# Altium PCB PCB_RAM1.PcbDoc
Units mil, origin at the board's own origin, x right, y up, seen from the top; angles counter-clockwise.
Board outline 3440 x 3440 mil, 4 copper layers (Top Signal, PWR, GND, Bottom Signal), stack 23.756 mil thick; 46 components, 96 nets, 440 pads, 4 vias.
Unrouted connection lines stored in the file: 277.
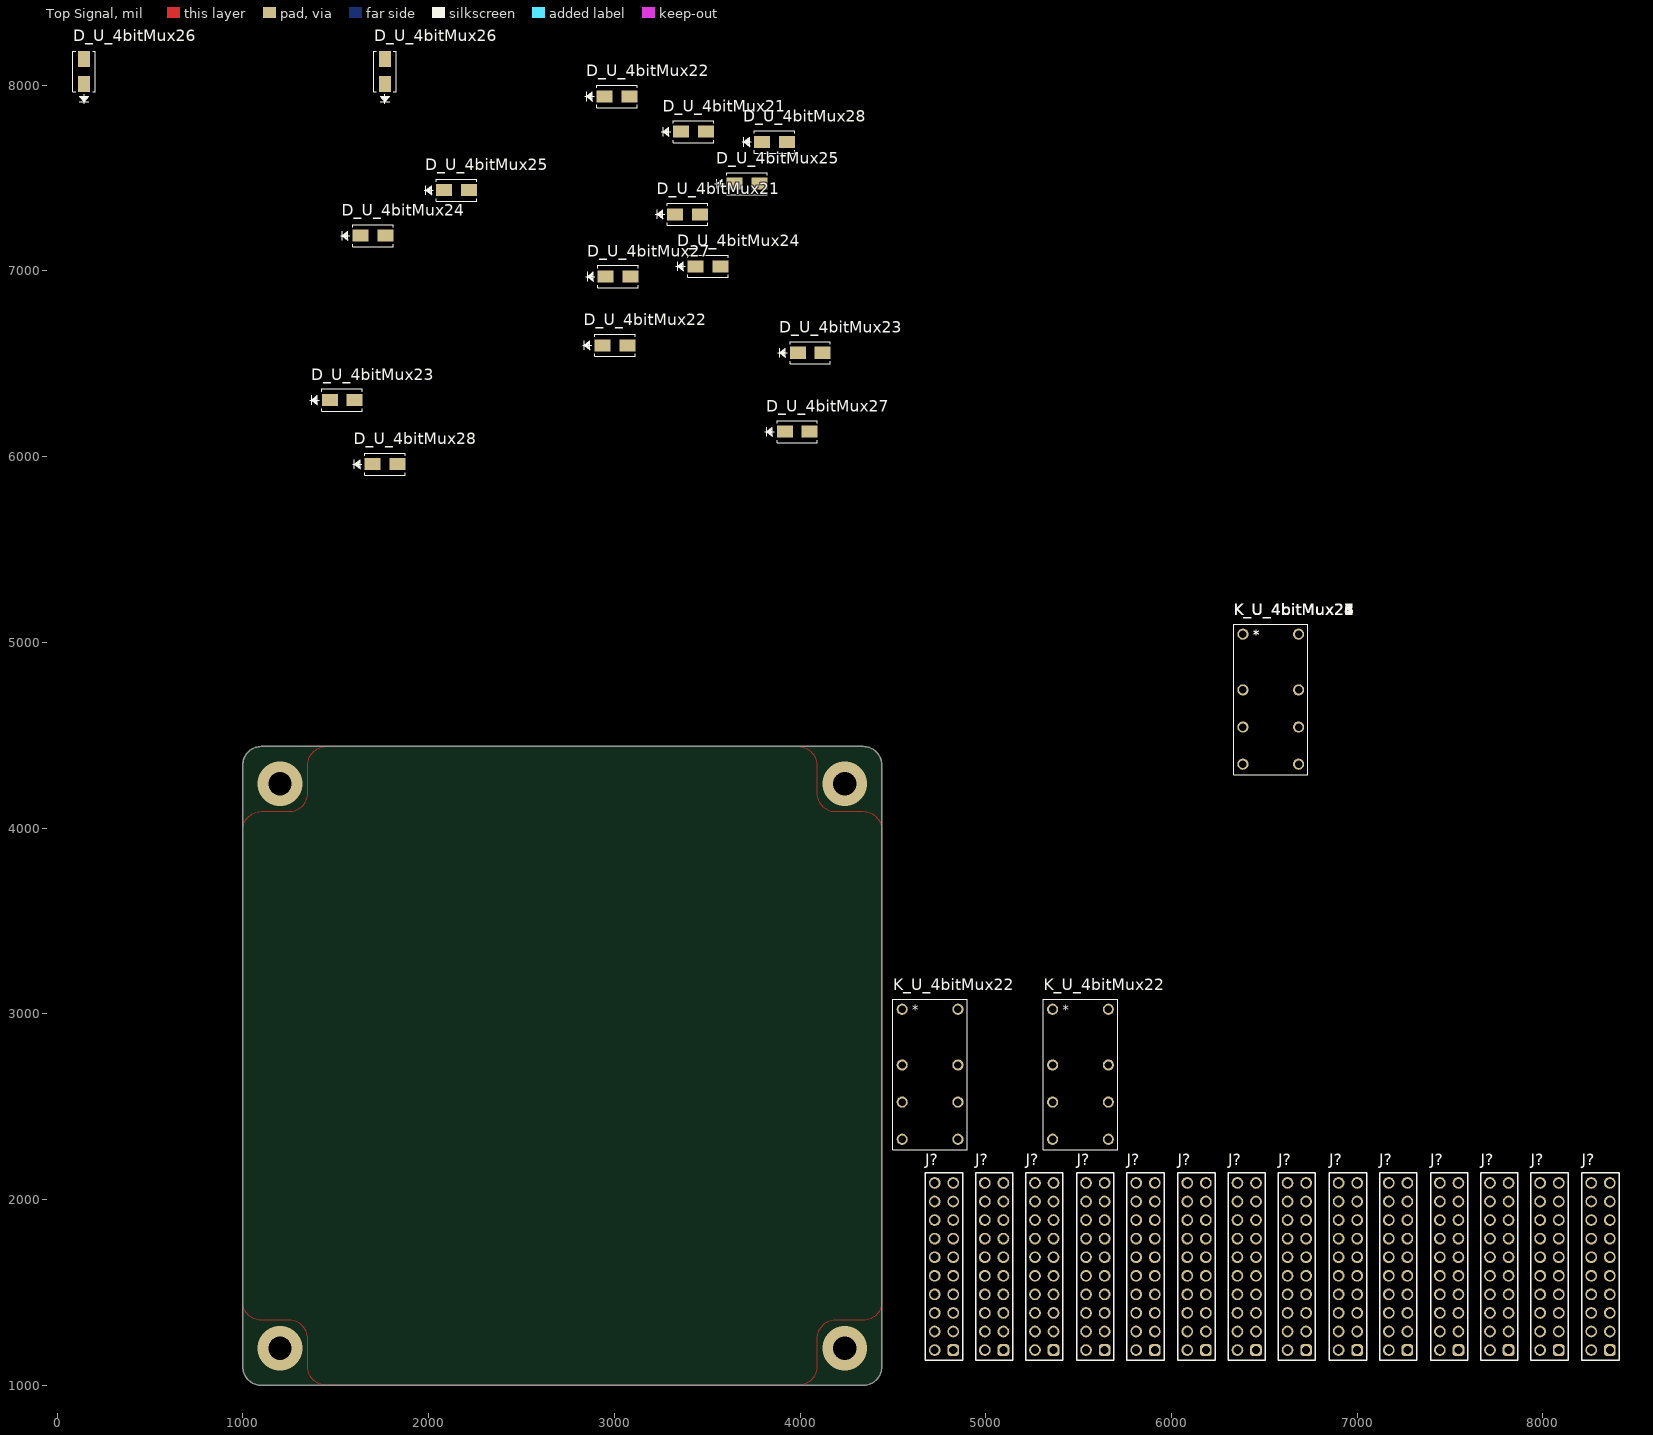
[diagram p0: Top Signal view]
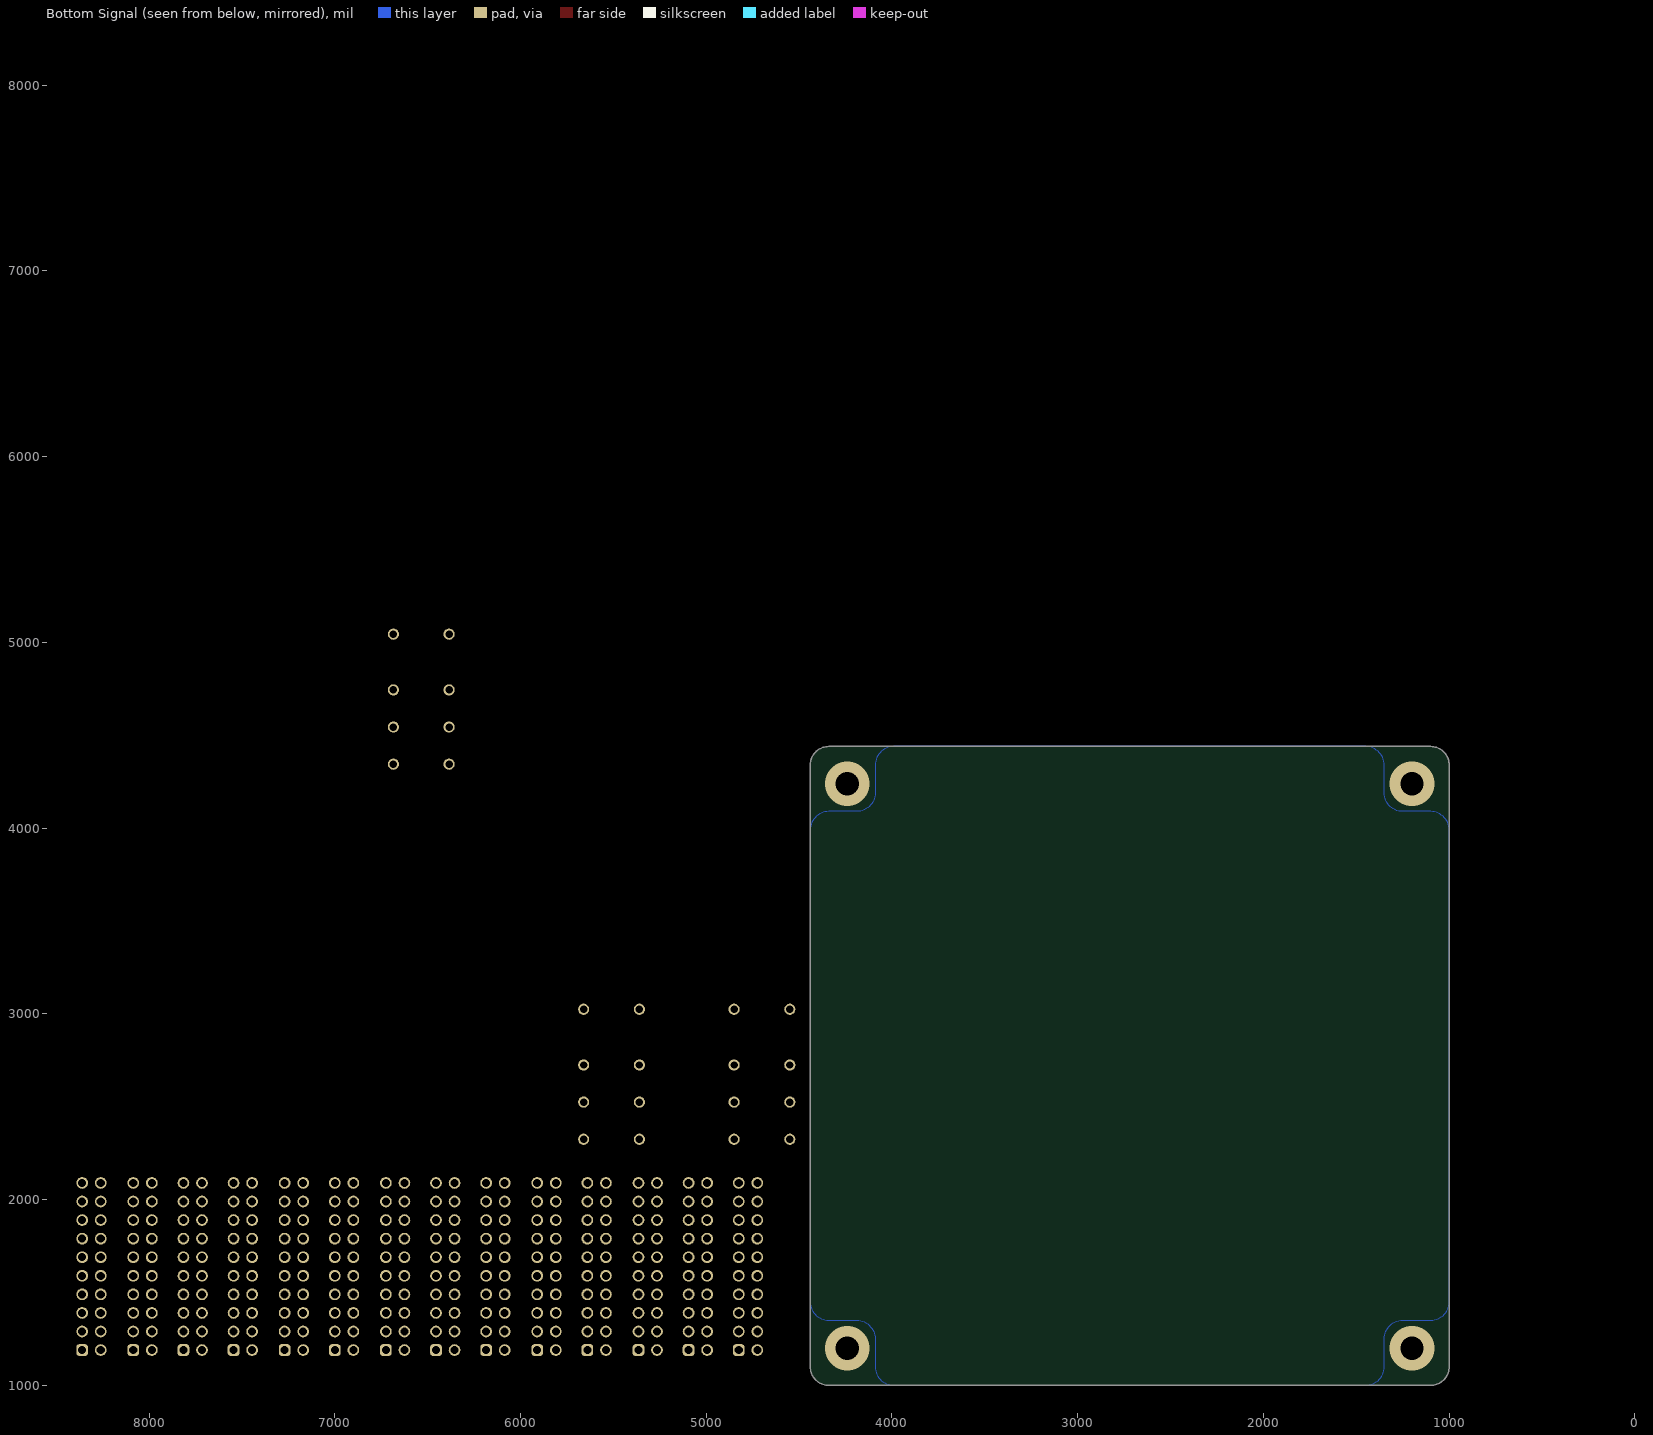
[diagram p1: Bottom Signal view, seen from below]
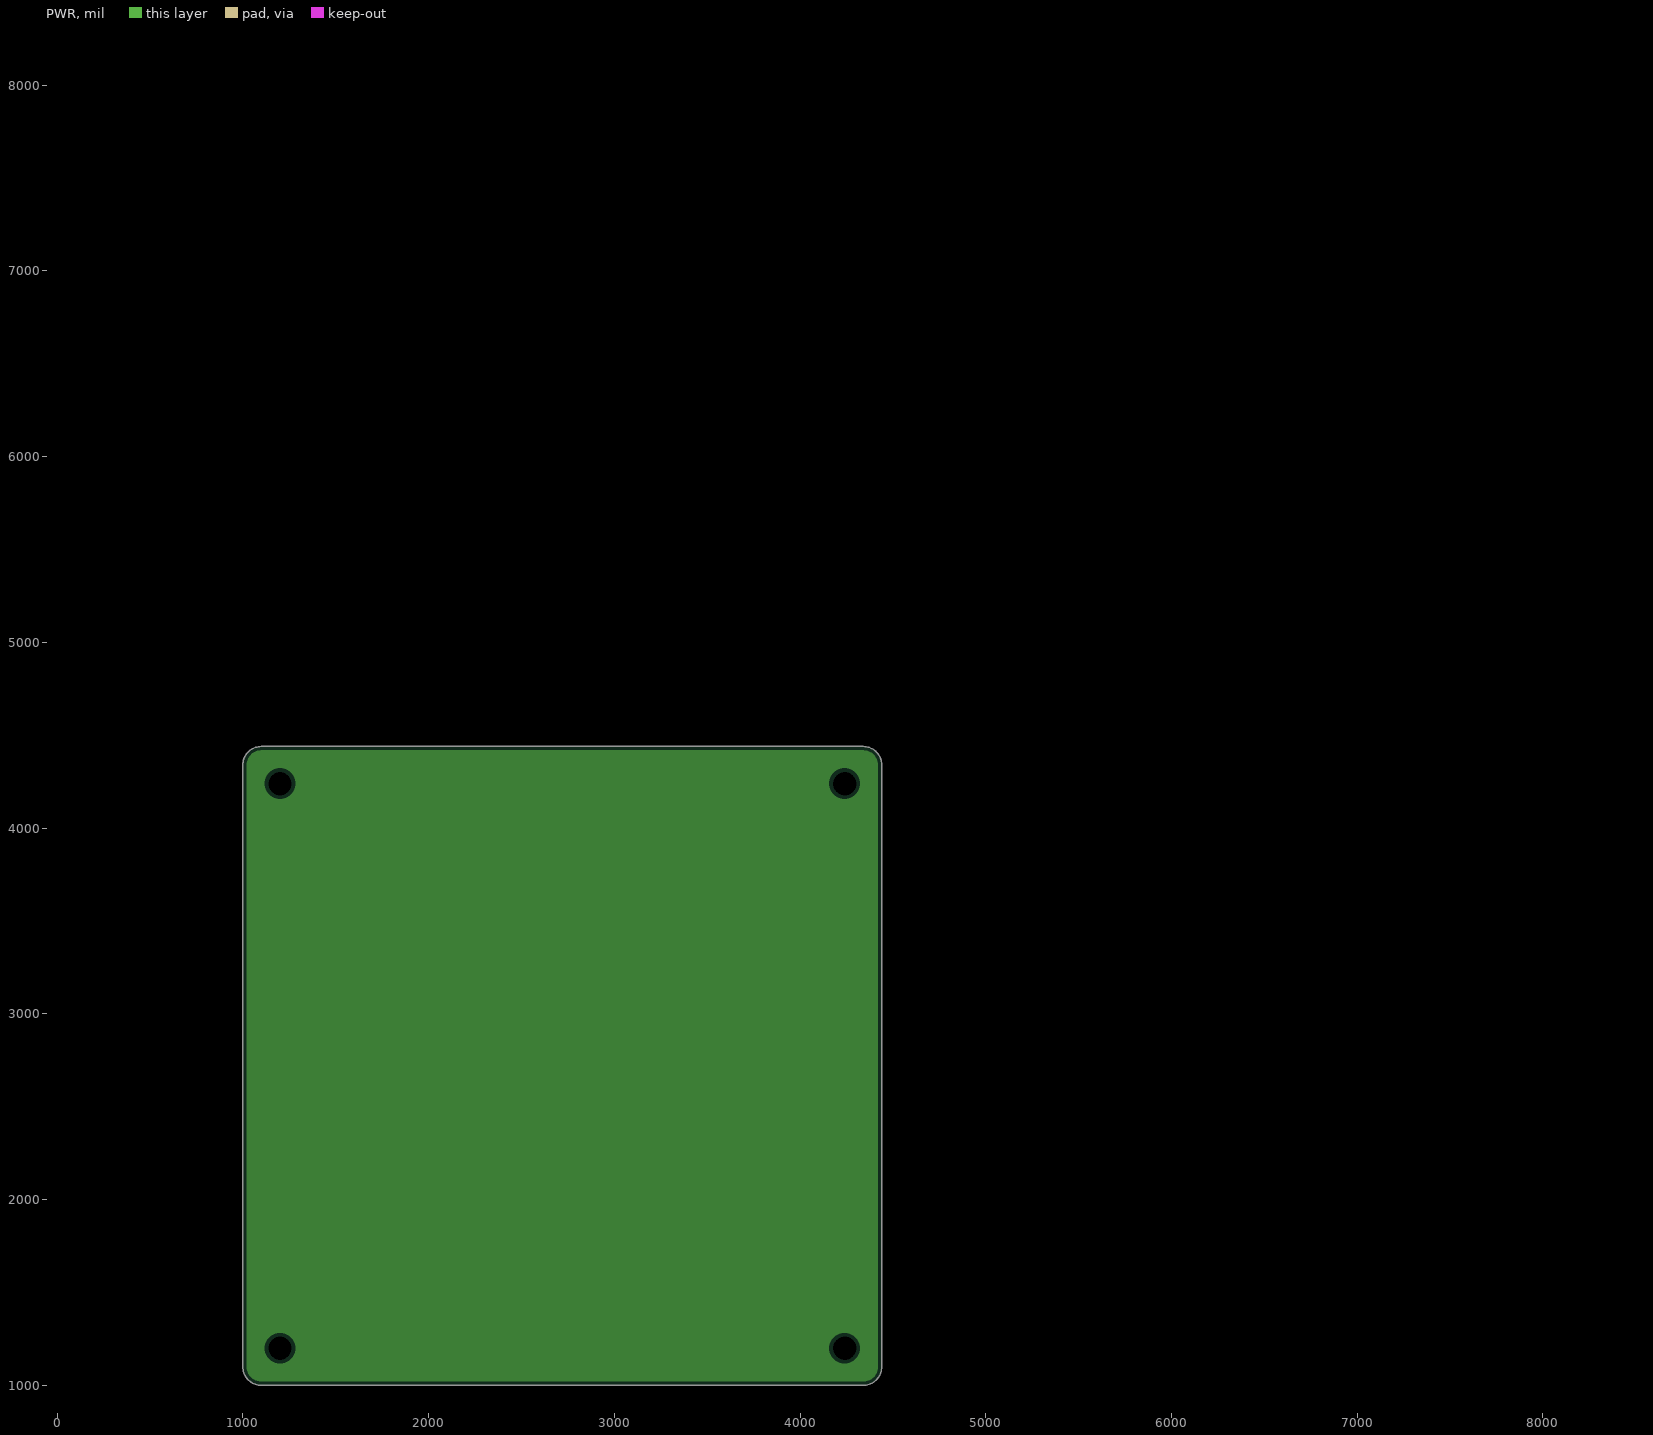
[diagram p2: PWR, clearances drawn from the general rule]
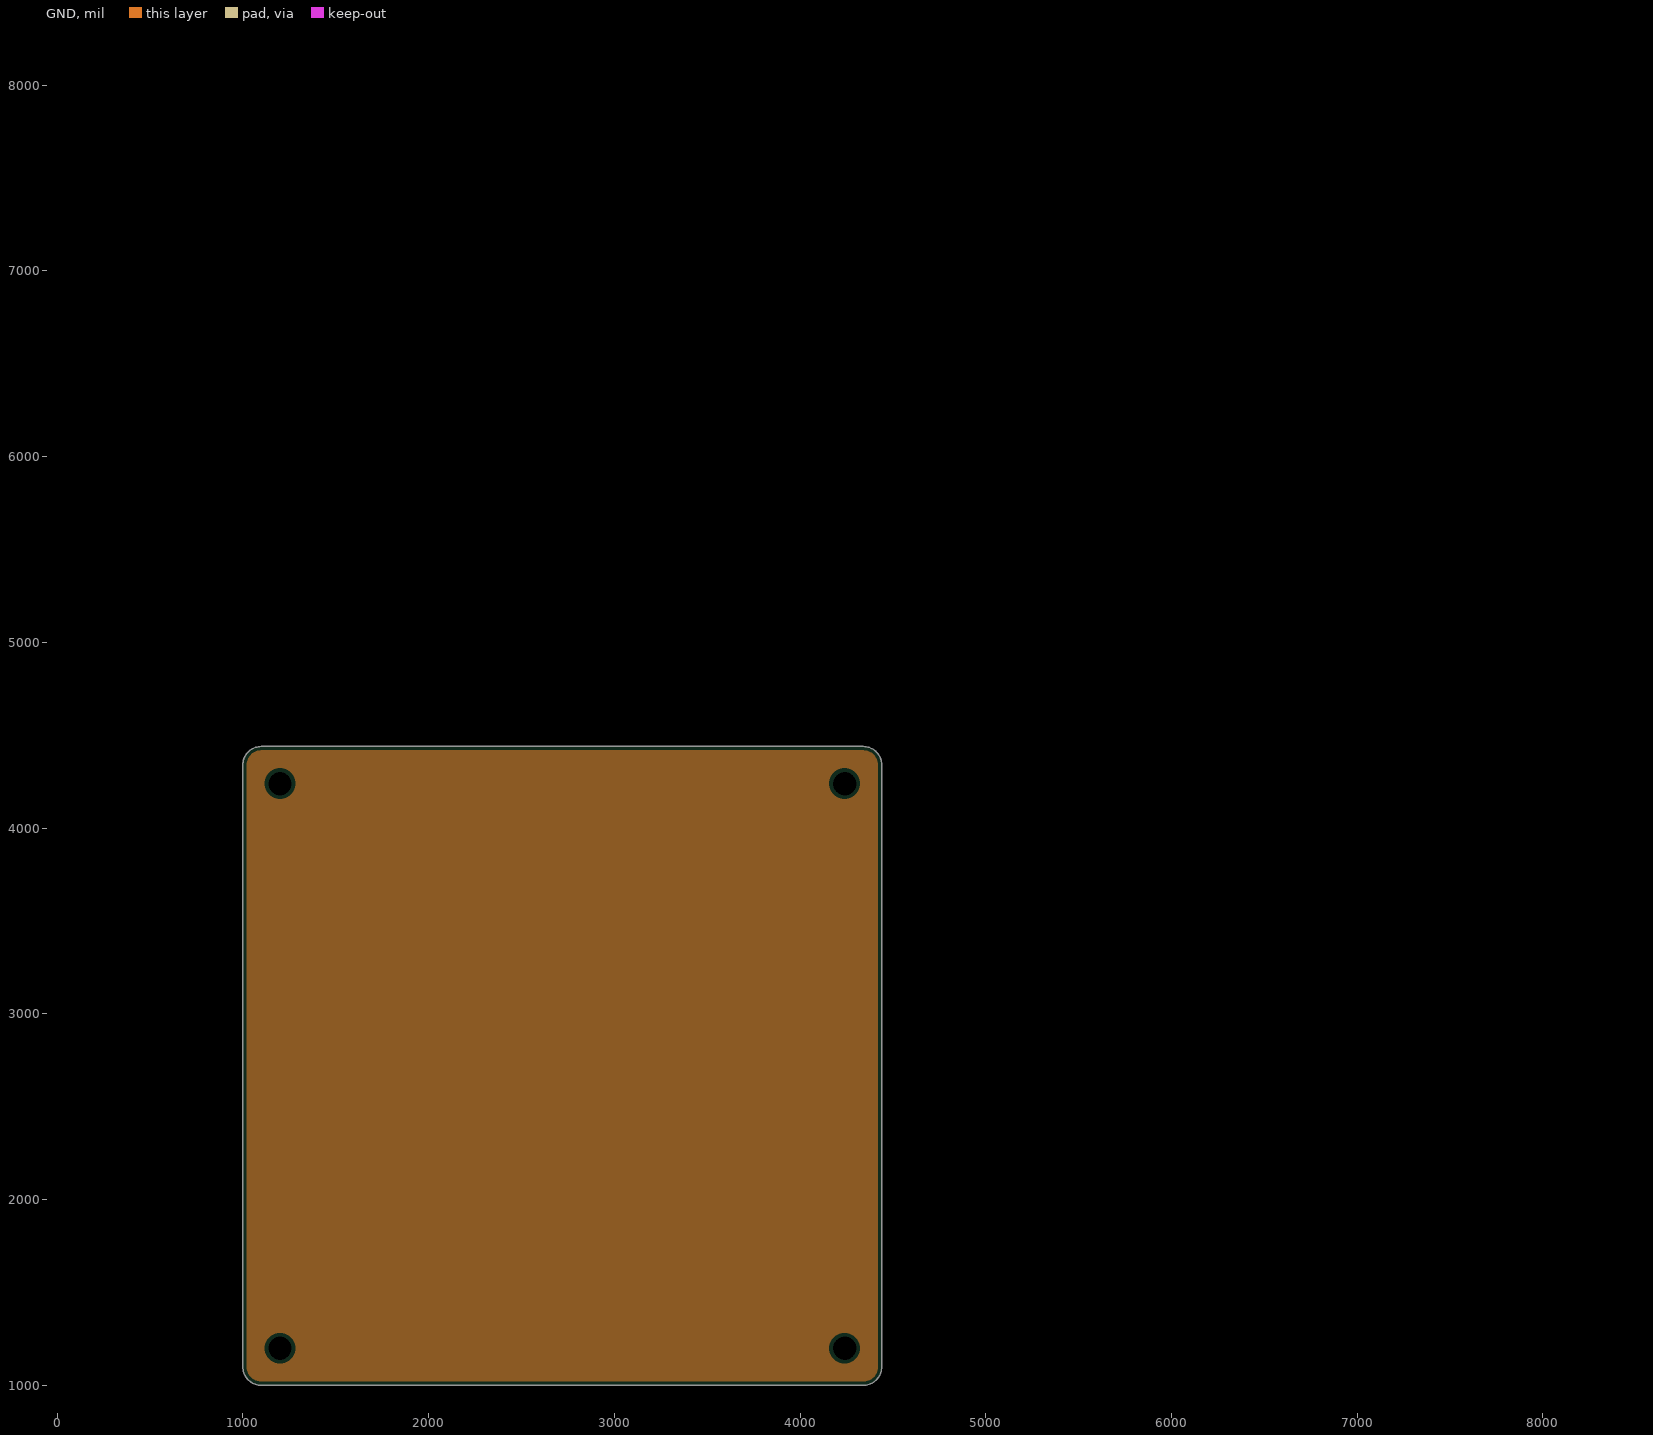
[diagram p3: GND, clearances drawn from the general rule]

## Layer stack, top to bottom
Top Solder: solder mask 0.4, Solder Resist, Dk 3.5
Top Signal: signal copper 1.4
Dielectric 2: prepreg 2.8, PP-006, Dk 4.1
PWR: plane copper 1.378, net +24V
Dielectric 1: dielectric 12.6, FR-4, Dk 4.8
GND: plane copper 1.378, net GND
Dielectric 3: prepreg 2.8, PP-006, Dk 4.1
Bottom Signal: signal copper 1.4
Bottom Solder: solder mask 0.4, Solder Resist, Dk 3.5

## Board outline
1000,4340 cw(c1100,4340) 1100,4440 4340,4440 cw(c4340,4340) 4440,4340 4440,1100 cw(c4340,1100) 4340,1000 1100,1000 cw(c1100,1100) 1000,1100 1000,2825

## Design rules (kind name [scope] priority, off if disabled: settings)
Clearance [All] p1: gap=10 ignorepadtopadclearanceinfootprint=FALSE
PlaneClearance [All] p1: clearance=20
PlaneConnect [All] p1: planeconnectstyle=Relief reliefexpansion=20 reliefentries=4 reliefconductorwidth=10 reliefairgap=10
PolygonConnect [All] p1: connectstyle=Relief reliefconductorwidth=10 reliefentries=4 polygonreliefangle="90 Angle" airgapwidth=10
RoutingVias [All] p1: holewidth=28 width=50 viastyle="Through Hole" minholewidth=28 minwidth=50 maxholewidth=28 maxwidth=50
SolderMaskExpansion [All] p1: expansion=4 istentingtop=FALSE
SupplyNets "Schematic Supply Nets_1" [InNet('GND')] p1: voltage=0.000
SupplyNets "Schematic Supply Nets" [InNet('+24V')] p2: voltage=0.000
Width [All] p1: maxlimit=10 minlimit=10 preferedwidth=10
28 further rules are at their usual default settings.

## Classes and differential pairs
component class RAM1_top: J?
channel class 4bitMux2: U_4bitMux21 U_4bitMux22 U_4bitMux23 U_4bitMux24 U_4bitMux25 U_4bitMux26 U_4bitMux27 U_4bitMux28
component class U_4bitMux28: D_U_4bitMux27 K_U_4bitMux28
component class U_4bitMux27: D_U_4bitMux21 K_U_4bitMux27
component class U_4bitMux26: D_U_4bitMux21 K_U_4bitMux26
component class U_4bitMux25: D_U_4bitMux22 K_U_4bitMux25
component class U_4bitMux24: D_U_4bitMux21 K_U_4bitMux24
component class U_4bitMux23: D_U_4bitMux21 K_U_4bitMux23
component class U_4bitMux22: D_U_4bitMux22 K_U_4bitMux22
component class U_4bitMux21: D_U_4bitMux24 K_U_4bitMux21

## Components (designator, comment, footprint, x,y, rotation, side; value= is the part's Value field where it differs from the comment)
D_U_4bitMux21 "SMAJ24A" "DI SMAJ24A" 3427,7750 r0 top value=650pF (schematic designator D)
D_U_4bitMux21 "SMAJ24A" "DI SMAJ24A" 3395,7305 r0 top value=650pF (schematic designator D)
D_U_4bitMux22 "SMAJ24A" "DI SMAJ24A" 3003,6600 r0 top value=650pF (schematic designator D)
D_U_4bitMux22 "SMAJ24A" "DI SMAJ24A" 3015,7940 r0 top value=650pF (schematic designator D)
D_U_4bitMux23 "SMAJ24A" "DI SMAJ24A" 4055,6560 r0 top value=650pF (schematic designator D)
D_U_4bitMux23 "SMAJ24A" "DI SMAJ24A" 1535,6305 r0 top value=650pF (schematic designator D)
D_U_4bitMux24 "SMAJ24A" "DI SMAJ24A" 1700,7190 r0 top value=650pF (schematic designator D)
D_U_4bitMux24 "SMAJ24A" "DI SMAJ24A" 3505,7025 r0 top value=650pF (schematic designator D)
D_U_4bitMux25 "SMAJ24A" "DI SMAJ24A" 3715,7470 r0 top value=650pF (schematic designator D)
D_U_4bitMux25 "SMAJ24A" "DI SMAJ24A" 2150,7435 r0 top value=650pF (schematic designator D)
D_U_4bitMux26 "SMAJ24A" "DI SMAJ24A" 145,8075 r90 top value=650pF (schematic designator D)
D_U_4bitMux26 "SMAJ24A" "DI SMAJ24A" 1765,8075 r90 top value=650pF (schematic designator D)
D_U_4bitMux27 "SMAJ24A" "DI SMAJ24A" 3020,6970 r0 top value=650pF (schematic designator D)
D_U_4bitMux27 "SMAJ24A" "DI SMAJ24A" 3985,6135 r0 top value=650pF (schematic designator D)
D_U_4bitMux28 "SMAJ24A" "DI SMAJ24A" 3862,7695 r0 top value=650pF (schematic designator D)
D_U_4bitMux28 "SMAJ24A" "DI SMAJ24A" 1765,5960 r0 top value=650pF (schematic designator D)
J? "Con 2.54mm 10x2pos" "Con 2.54mm 10x2pos" 6405,1640 r90 top
J? "Con 2.54mm 10x2pos" "Con 2.54mm 10x2pos" 7495,1640 r90 top
J? "Con 2.54mm 10x2pos" "Con 2.54mm 10x2pos" 6675,1640 r90 top
J? "Con 2.54mm 10x2pos" "Con 2.54mm 10x2pos" 5590,1640 r90 top
J? "Con 2.54mm 10x2pos" "Con 2.54mm 10x2pos" 5860,1640 r90 top
J? "Con 2.54mm 10x2pos" "Con 2.54mm 10x2pos" 7220,1640 r90 top
J? "Con 2.54mm 10x2pos" "Con 2.54mm 10x2pos" 5045,1640 r90 top
J? "Con 2.54mm 10x2pos" "Con 2.54mm 10x2pos" 7765,1640 r90 top
J? "Con 2.54mm 10x2pos" "Con 2.54mm 10x2pos" 6135,1640 r90 top
J? "Con 2.54mm 10x2pos" "Con 2.54mm 10x2pos" 4775,1640 r90 top
J? "Con 2.54mm 10x2pos" "Con 2.54mm 10x2pos" 5315,1640 r90 top
J? "Con 2.54mm 10x2pos" "Con 2.54mm 10x2pos" 8310,1640 r90 top
J? "Con 2.54mm 10x2pos" "Con 2.54mm 10x2pos" 8035,1640 r90 top
J? "Con 2.54mm 10x2pos" "Con 2.54mm 10x2pos" 6950,1640 r90 top
K_U_4bitMux21 "J104D2C24VDC.15S" "Relay J104D2C24VDC.15S" 6384.5,5044.5 r0 top (schematic designator K)
K_U_4bitMux21 "J104D2C24VDC.15S" "Relay J104D2C24VDC.15S" 6384.5,5044.5 r0 top (schematic designator K)
K_U_4bitMux22 "J104D2C24VDC.15S" "Relay J104D2C24VDC.15S" 5360,3025 r0 top (schematic designator K)
K_U_4bitMux22 "J104D2C24VDC.15S" "Relay J104D2C24VDC.15S" 4550,3025 r0 top (schematic designator K)
K_U_4bitMux23 "J104D2C24VDC.15S" "Relay J104D2C24VDC.15S" 6384.5,5044.5 r0 top (schematic designator K)
K_U_4bitMux23 "J104D2C24VDC.15S" "Relay J104D2C24VDC.15S" 6384.5,5044.5 r0 top (schematic designator K)
K_U_4bitMux24 "J104D2C24VDC.15S" "Relay J104D2C24VDC.15S" 6384.5,5044.5 r0 top (schematic designator K)
K_U_4bitMux24 "J104D2C24VDC.15S" "Relay J104D2C24VDC.15S" 6384.5,5044.5 r0 top (schematic designator K)
K_U_4bitMux25 "J104D2C24VDC.15S" "Relay J104D2C24VDC.15S" 6384.5,5044.5 r0 top (schematic designator K)
K_U_4bitMux25 "J104D2C24VDC.15S" "Relay J104D2C24VDC.15S" 6384.5,5044.5 r0 top (schematic designator K)
K_U_4bitMux26 "J104D2C24VDC.15S" "Relay J104D2C24VDC.15S" 6384.5,5044.5 r0 top (schematic designator K)
K_U_4bitMux26 "J104D2C24VDC.15S" "Relay J104D2C24VDC.15S" 6384.5,5044.5 r0 top (schematic designator K)
K_U_4bitMux27 "J104D2C24VDC.15S" "Relay J104D2C24VDC.15S" 6384.5,5044.5 r0 top (schematic designator K)
K_U_4bitMux27 "J104D2C24VDC.15S" "Relay J104D2C24VDC.15S" 6384.5,5044.5 r0 top (schematic designator K)
K_U_4bitMux28 "J104D2C24VDC.15S" "Relay J104D2C24VDC.15S" 6384.5,5044.5 r0 top (schematic designator K)
K_U_4bitMux28 "J104D2C24VDC.15S" "Relay J104D2C24VDC.15S" 6384.5,5044.5 r0 top (schematic designator K)

## Footprints (in the part's own frame and the unit in brackets; to place one, negate y for a bottom-side part, rotate by r counter-clockwise, add the part's x,y. Pads: shape width x height; smd on the part's side, far side on the other; paste and mask are expansions set on the pad)
"Con 2.54mm 10x2pos" [mm]
  rrect50% 1.6x1.6 hole 1.1: 1(-11.43,-1.27)
  round 1.6 hole 1.1: 2(-11.43,1.27) 3(-8.89,-1.27) 4(-8.89,1.27) 5(-6.35,-1.27) 6(-6.35,1.27) 7(-3.81,-1.27) 8(-3.81,1.27) 9(-1.27,-1.27) 10(-1.27,1.27) 11(1.27,-1.27) 12(1.27,1.27) 13(3.81,-1.27) 14(3.81,1.27) 15(6.35,-1.27) 16(6.35,1.27) 17(8.89,-1.27) 18(8.89,1.27) 19(11.43,-1.27) 20(11.43,1.27)
  silkscreen extent -12.83,-2.54 12.83,2.54
"DI SMAJ24A" [mil]
  rect 86x65 smd paste+0 mask+4: 1(-67,0) 2(67,0)
  silkscreen extent -174,-60 109,60, body extent -104,-55 104,55, height 92
"Relay J104D2C24VDC.15S" [mil]
  round 60 hole 40 paste-99999 mask+0: 1(0,0) 2(0,-300) 3(0,-500) 4(0,-700) 5(300,-700) 6(300,-500) 7(300,-300) 8(300,0)
  silkscreen extent -50,-756 350,54, body extent -45,-751 345,49, height 450

## Part data
D_U_4bitMux21 D_U_4bitMux21 D_U_4bitMux22 D_U_4bitMux22 D_U_4bitMux23 D_U_4bitMux23 D_U_4bitMux24 D_U_4bitMux24 D_U_4bitMux25 D_U_4bitMux25 D_U_4bitMux26 D_U_4bitMux26 D_U_4bitMux27 D_U_4bitMux27 D_U_4bitMux28 D_U_4bitMux28: library part "DI SMAJ24A", "SMAJ Series 400 W 24 V Uni-Directional Surface Mount TVS Diode - DO-214AC", Breakdown Voltage=28.1V, Case/Package=SMA, Clamping Voltage=38.9V, Forward Voltage=3.5V, Leakage Current=1µA, Manufacturer=Littelfuse, Max Breakdown Voltage=29.5V, Max Junction Temperature (Tj)=150°C, Max Output current=10.3A, Max Power Dissipation=3.3W, Min Breakdown Voltage=26.7V, Min Operating Temperature=-65°C, Operating Supply Voltage=24V, Peak Pulse Power=400W, Power Line Protection=No, Supplier Part Number=SMAJ24ALFCT-ND, Test Current=1mA, Category="TVS Diodes", China RoHS=Non-Compliant, ComponentLink1Description=https://datasheet.octopart.com:443/SMAJ24A-Littelfuse-datasheet-150463581.pdf?src-supplier=Farnell, ComponentLink1URL=https://datasheet.octopart.com:443/SMAJ24A-Littelfuse-datasheet-150463581.pdf?src-supplier=Farnell, ComponentLink2Description=https://datasheet.octopart.com:443/SMAJ24A-Littelfuse-datasheet-63710798.pdf?src-supplier=element14+APAC, ComponentLink2URL=https://datasheet.octopart.com:443/SMAJ24A-Littelfuse-datasheet-63710798.pdf?src-supplier=element14+APAC, ComponentLink3Description=https://datasheet.octopart.com:443/SMAJ24A-Littelfuse-datasheet-11547152.pdf?src-supplier=element14+APAC, ComponentLink3URL=https://datasheet.octopart.com:443/SMAJ24A-Littelfuse-datasheet-11547152.pdf?src-supplier=element14+APAC, ComponentLink4Description=https://datasheet.octopart.com:443/SMAJ24A-Littelfuse-datasheet-5393952.pdf?src-supplier=element14+APAC, ComponentLink4URL=https://datasheet.octopart.com:443/SMAJ24A-Littelfuse-datasheet-5393952.pdf?src-supplier=element14+APAC, ComponentLink5Description=https://datasheet.octopart.com:443/SMAJ24A-Littelfuse-datasheet-511791.pdf?src-supplier=element14+APAC, ComponentLink5URL=https://datasheet.octopart.com:443/SMAJ24A-Littelfuse-datasheet-511791.pdf?src-supplier=element14+APAC, ComponentLink6Description=https://datasheet.octopart.com:443/SMAJ24A-Littelfuse-datasheet-164649624.pdf?src-supplier=JRH+Electronics, ComponentLink6URL=https://datasheet.octopart.com:443/SMAJ24A-Littelfuse-datasheet-164649624.pdf?src-supplier=JRH+Electronics, ComponentLink7Description=https://datasheet.octopart.com:443/SMAJ24A-Littelfuse-datasheet-38878911.pdf?src-supplier=RS+(Formerly+Allied+Electronics), ComponentLink7URL=https://datasheet.octopart.com:443/SMAJ24A-Littelfuse-datasheet-38878911.pdf?src-supplier=RS+(Formerly+Allied+Electronics), ComponentLink8Description=https://datasheet.octopart.com:443/SMAJ24A-Littelfuse-datasheet-17901671.pdf?src-supplier=Future+Electronics, ComponentLink8URL=https://datasheet.octopart.com:443/SMAJ24A-Littelfuse-datasheet-17901671.pdf?src-supplier=Future+Electronics, ComponentLink9Description=https://datasheet.octopart.com:443/SMAJ24A-Littelfuse-datasheet-1053.pdf?src-supplier=DigiKey, ComponentLink9URL=https://datasheet.octopart.com:443/SMAJ24A-Littelfuse-datasheet-1053.pdf?src-supplier=DigiKey, Composition=Zener, Direction=Unidirectional, Element Configuration=Single, Height=2.29mm, Lead Free="Lead Free", Length=4.5mm, Lifecycle Status=Production, Manufacturer Part Number=SMAJ24A, Max Operating Temperature=150°C, Max Reverse Leakage Current=1µA, Max Surge Current=10.3A, Mounting Technology="Surface Mount", Number of Channels=1, Number of Elements=1, Number of Terminals=2, Number of Unidirectional Channels=1, Packaging="Tape & Reel", Peak Pulse Current=10.3A, Peak Reverse Current=1µA, Pins=2, Polarity=Unidirectional, Power Dissipation=400W, Power Rating=400W, Pricing="1=0.21, 10=0.113, 100=0.074, 500=0.072, 1000=0.071 (USD)", Radiation Hardening=No, REACH SVHC=No, Reverse Breakdown Voltage=26.7V, Reverse Standoff Voltage=24V, Reverse Voltage=24V, RoHS=Compliant, Schedule B="8541100080, 8541100080|8541100080|8541100080|8541100080|8541100080", Stock=97583, Supplier=DigiKey, Termination=SMD/SMT, Voltage Rating (DC)=24V, Width=2.79mm
J? J? J? J? J? J? J? J? J? J? J? J? J? J?: "WR-BHD Straight Male, Box Header, Through Hole, 2 Rows, 20 Contacts, 2.54mm Pitch", Color=Black, Contact Resistance=20mΩ, Current Rating=3A, Flammability Rating="UL94 V-0", Insulation Resistance=1GΩ, Manufacturer="Wurth Elektronik", Manufacturer Part Number=61202021621, Max Operating Temperature=105°C, Min Operating Temperature=-40°C, Operating Supply Voltage=250V, Supplier Part Number=732-2096-ND, Category="Headers and Wire Housings", ComponentLink1Description=https://datasheet.octopart.com:443/61202021621-W%C3%BCrth-Elektronik-datasheet-111087935.pdf?src-supplier=Upverter, ComponentLink1URL=https://datasheet.octopart.com:443/61202021621-W%C3%BCrth-Elektronik-datasheet-111087935.pdf?src-supplier=Upverter, ComponentLink2Description=https://datasheet.octopart.com:443/61202021621-Wurth-Elektronik-datasheet-168480024.pdf?src-supplier=Wurth+Elektronik, ComponentLink2URL=https://datasheet.octopart.com:443/61202021621-Wurth-Elektronik-datasheet-168480024.pdf?src-supplier=Wurth+Elektronik, ComponentLink3Description=https://datasheet.octopart.com:443/61202021621-W%C3%BCrth-Elektronik-datasheet-149523954.pdf?src-supplier=Farnell, ComponentLink3URL=https://datasheet.octopart.com:443/61202021621-W%C3%BCrth-Elektronik-datasheet-149523954.pdf?src-supplier=Farnell, ComponentLink4Description=https://datasheet.octopart.com:443/61202021621-W%C3%BCrth-Elektronik-Midcom-datasheet-10469446.pdf?src-supplier=Farnell, ComponentLink4URL=https://datasheet.octopart.com:443/61202021621-W%C3%BCrth-Elektronik-Midcom-datasheet-10469446.pdf?src-supplier=Farnell, ComponentLink5Description=https://datasheet.octopart.com:443/61202021621-W%C3%BCrth-Elektronik-Midcom-datasheet-5367532.pdf?src-supplier=element14+APAC, ComponentLink5URL=https://datasheet.octopart.com:443/61202021621-W%C3%BCrth-Elektronik-Midcom-datasheet-5367532.pdf?src-supplier=element14+APAC, Connector Type="Male Pin", Contact Gender=Male, Contact Material=Gold, Contact Plating=Gold, Gender=Male, Height=9.25mm, Housing Material=PBT, Insulation=Insulated, Insulation Material=PBT, Lead Pitch=2.54mm, Length=33.06mm, Mounting Technology="Through Hole", Number of Contacts=20, Number of Positions=20, Number of Rows=2, Orientation=Vertical, Pins=20, Pitch=2.54mm, Pricing="1=0.86, 10=0.839, 50=0.7732, 160=0.69213, 320=0.64375 (USD)", RoHS=Compliant, Row Spacing=2.54mm, Stock=12933, Supplier=DigiKey, Termination="Through Hole", Voltage Rating=250V, Voltage Rating (DC)=250V, Width=33.06mm
K_U_4bitMux21 K_U_4bitMux21 K_U_4bitMux22 K_U_4bitMux22 K_U_4bitMux23 K_U_4bitMux23 K_U_4bitMux24 K_U_4bitMux24 K_U_4bitMux25 K_U_4bitMux25 K_U_4bitMux26 K_U_4bitMux26 K_U_4bitMux27 K_U_4bitMux27 K_U_4bitMux28 K_U_4bitMux28: library part "Relay J104D2C24VDC.15S", "Relay Ul Gen Purp DPDT 2C 24VDC", Coil Current=6mA, Coil Power=150mW, Coil Resistance=3.84kΩ, Coil Voltage (DC)=18V, Contact Current Rating=2A, Contact Resistance=50mΩ, Contact Voltage Rating (AC)=250V, Insulation Resistance=100MΩ, Manufacturer="CIT Relay & Switch", Max Operating Temperature=85°C, Max Voltage Rating (DC)=100V, Min Operating Temperature=-40°C, Supplier Part Number=2449-J104D2C24VDC.15S-ND, Category="Signal Relays", Contact Plating=Gold, Electrical Life=100kcycles, Height=11.42mm, Length=20.37mm, Manufacturer Part Number=J104D2C24VDC.15S, Max Current Rating=2A, Number of Terminals=8, Pricing="1=1.26, 20=1.082, 40=1.045, 60=1.02383, 100=0.998, 260=0.95115, 500=0.92036, 1000=0.88878, 5000=0.8195 (USD)", Release Time=4ms, Response Time=6ms, Stock=5620, Supplier=DigiKey, Throw Configuration=DPDT

## Via types
v1: diameter 240, hole 126, Top Signal to Bottom Signal, 4 vias

## Nets (pads, with @x,y where several pads share a name; then routed paths per layer and width w, separated by ;. In a path a pad name is that pad's centre, name@x,y a point inside that pad or via, vN(x,y) a via of type N, cw(c..) or ccw(c..) an arc to the next point about the centre after c; other vN are vias at no path point)
+24V: J?.1 J?.2 J?.3 J?.4
Ab0: D_U_4bitMux21.1 D_U_4bitMux22.1 D_U_4bitMux23.1 D_U_4bitMux24.1 J?.6@6900,1390 K_U_4bitMux21.1 K_U_4bitMux22.1 K_U_4bitMux23.1 K_U_4bitMux24.1
Ab1: J?.6@4725,1390 J?.8@6900,1490
Ab2: J?.8@4725,1490 J?.10@6900,1590
Ab3: J?.10@4725,1590 J?.12@6900,1690
At0: D_U_4bitMux25.1 D_U_4bitMux26.1 D_U_4bitMux27.1 D_U_4bitMux28.1 J?.5@7000,1390 K_U_4bitMux25.1 K_U_4bitMux26.1 K_U_4bitMux27.1 K_U_4bitMux28.1
At1: J?.5@4825,1390 J?.7@7000,1490
At2: J?.7@4825,1490 J?.9@7000,1590
At3: J?.9@4825,1590 J?.11@7000,1690
CLK: J?.12@4725,1690 J?.15@5910,1890 J?.15@6185,1890 J?.15@6455,1890 J?.15@6725,1890 J?.15@7000,1890 J?.15@7545,1890 J?.15@7815,1890 J?.15@8085,1890 J?.15@8360,1890
GND: D_U_4bitMux21.2 D_U_4bitMux22.2 D_U_4bitMux23.2 D_U_4bitMux24.2 D_U_4bitMux25.2 D_U_4bitMux26.2 D_U_4bitMux27.2 D_U_4bitMux28.2 J?.17 J?.18 J?.19 J?.20 K_U_4bitMux21.8 K_U_4bitMux22.8 K_U_4bitMux23.8 K_U_4bitMux24.8 K_U_4bitMux25.8 K_U_4bitMux26.8 K_U_4bitMux27.8 K_U_4bitMux28.8
r0D0: J?.5@5910,1390 J?.5@6185,1390 J?.5@6455,1390 J?.5@6725,1390 J?.5@7270,1390 J?.5@7545,1390 J?.5@7815,1390 J?.5@8085,1390 J?.5@8360,1390
r0D1: J?.7@5910,1490 J?.7@6185,1490 J?.7@6455,1490 J?.7@6725,1490 J?.7@7270,1490 J?.7@7545,1490 J?.7@7815,1490 J?.7@8085,1490 J?.7@8360,1490
r0D2: J?.9@5910,1590 J?.9@6185,1590 J?.9@6455,1590 J?.9@6725,1590 J?.9@7270,1590 J?.9@7545,1590 J?.9@7815,1590 J?.9@8085,1590 J?.9@8360,1590
r0D3: J?.11@5910,1690 J?.11@6185,1690 J?.11@6455,1690 J?.11@6725,1690 J?.11@7270,1690 J?.11@7545,1690 J?.11@7815,1690 J?.11@8085,1690 J?.11@8360,1690
r0LD: J?.13@7545,1790
r0Q0: J?.6@7445,1390 K_U_4bitMux24.6@6684.5,4544.5 K_U_4bitMux28.6@6684.5,4544.5
r0Q1: J?.8@7445,1490 K_U_4bitMux24.3@6384.5,4544.5 K_U_4bitMux28.3@6384.5,4544.5
r0Q2: J?.10@7445,1590 K_U_4bitMux24.6@6684.5,4544.5 K_U_4bitMux28.6@6684.5,4544.5
r0Q3: J?.12@7445,1690 K_U_4bitMux24.3@6384.5,4544.5 K_U_4bitMux28.3@6384.5,4544.5
r0r1RDb0: J?.6@5540,1390 K_U_4bitMux24.7@6684.5,4744.5
r0r1RDb1: J?.8@5540,1490 K_U_4bitMux24.2@6384.5,4744.5
r0r1RDb2: J?.10@5540,1590 K_U_4bitMux24.7@6684.5,4744.5
r0r1RDb3: J?.12@5540,1690 K_U_4bitMux24.2@6384.5,4744.5
r0r1RDt0: J?.5@5640,1390 K_U_4bitMux28.7@6684.5,4744.5
r0r1RDt1: J?.7@5640,1490 K_U_4bitMux28.2@6384.5,4744.5
r0r1RDt2: J?.9@5640,1590 K_U_4bitMux28.7@6684.5,4744.5
r0r1RDt3: J?.11@5640,1690 K_U_4bitMux28.2@6384.5,4744.5
r1LD: J?.13@7815,1790
r1Q0: J?.6@7715,1390 K_U_4bitMux24.5@6684.5,4344.5 K_U_4bitMux28.5@6684.5,4344.5
r1Q1: J?.8@7715,1490 K_U_4bitMux24.4@6384.5,4344.5 K_U_4bitMux28.4@6384.5,4344.5
r1Q2: J?.10@7715,1590 K_U_4bitMux24.5@6684.5,4344.5 K_U_4bitMux28.5@6684.5,4344.5
r1Q3: J?.12@7715,1690 K_U_4bitMux24.4@6384.5,4344.5 K_U_4bitMux28.4@6384.5,4344.5
r2LD: J?.13@8085,1790
r2Q0: J?.6@7985,1390 K_U_4bitMux23.6@6684.5,4544.5 K_U_4bitMux27.6@6684.5,4544.5
r2Q1: J?.8@7985,1490 K_U_4bitMux23.3@6384.5,4544.5 K_U_4bitMux27.3@6384.5,4544.5
r2Q2: J?.10@7985,1590 K_U_4bitMux23.6@6684.5,4544.5 K_U_4bitMux27.6@6684.5,4544.5
r2Q3: J?.12@7985,1690 K_U_4bitMux23.3@6384.5,4544.5 K_U_4bitMux27.3@6384.5,4544.5
r2r3RDb0: J?.13@5095,1790 K_U_4bitMux23.7@6684.5,4744.5
r2r3RDb1: J?.15@5095,1890 K_U_4bitMux23.2@6384.5,4744.5
r2r3RDb2: J?.14@4995,1790 K_U_4bitMux23.7@6684.5,4744.5
r2r3RDb3: J?.16@4995,1890 K_U_4bitMux23.2@6384.5,4744.5
r2r3RDt0: J?.13@5640,1790 K_U_4bitMux27.7@6684.5,4744.5
r2r3RDt1: J?.15@5640,1890 K_U_4bitMux27.2@6384.5,4744.5
r2r3RDt2: J?.14@5540,1790 K_U_4bitMux27.7@6684.5,4744.5
r2r3RDt3: J?.16@5540,1890 K_U_4bitMux27.2@6384.5,4744.5
r3LD: J?.13@8360,1790
r3Q0: J?.6@8260,1390 K_U_4bitMux23.5@6684.5,4344.5 K_U_4bitMux27.5@6684.5,4344.5
r3Q1: J?.8@8260,1490 K_U_4bitMux23.4@6384.5,4344.5 K_U_4bitMux27.4@6384.5,4344.5
r3Q2: J?.10@8260,1590 K_U_4bitMux23.5@6684.5,4344.5 K_U_4bitMux27.5@6684.5,4344.5
r3Q3: J?.12@8260,1690 K_U_4bitMux23.4@6384.5,4344.5 K_U_4bitMux27.4@6384.5,4344.5
r4LD: J?.13@5910,1790
r4Q0: J?.6@5810,1390 K_U_4bitMux22.6@5660,2525 K_U_4bitMux26.6@6684.5,4544.5
r4Q1: J?.8@5810,1490 K_U_4bitMux22.3@5360,2525 K_U_4bitMux26.3@6384.5,4544.5
r4Q2: J?.10@5810,1590 K_U_4bitMux22.6@4850,2525 K_U_4bitMux26.6@6684.5,4544.5
r4Q3: J?.12@5810,1690 K_U_4bitMux22.3@4550,2525 K_U_4bitMux26.3@6384.5,4544.5
r4r5RDb0: J?.6@4995,1390 J?.6@5265,1390 K_U_4bitMux22.7@5660,2725
r4r5RDb1: J?.8@4995,1490 J?.8@5265,1490 K_U_4bitMux22.2@5360,2725
r4r5RDb2: J?.10@4995,1590 J?.10@5265,1590 K_U_4bitMux22.7@4850,2725
r4r5RDb3: J?.12@4995,1690 J?.12@5265,1690 K_U_4bitMux22.2@4550,2725
r4r5RDt0: J?.5@5095,1390 J?.5@5365,1390 K_U_4bitMux26.7@6684.5,4744.5
r4r5RDt1: J?.7@5095,1490 J?.7@5365,1490 K_U_4bitMux26.2@6384.5,4744.5
r4r5RDt2: J?.9@5095,1590 J?.9@5365,1590 K_U_4bitMux26.7@6684.5,4744.5
r4r5RDt3: J?.11@5095,1690 J?.11@5365,1690 K_U_4bitMux26.2@6384.5,4744.5
r5LD: J?.13@6185,1790
r5Q0: J?.6@6085,1390 K_U_4bitMux22.5@5660,2325 K_U_4bitMux26.5@6684.5,4344.5
r5Q1: J?.8@6085,1490 K_U_4bitMux22.4@5360,2325 K_U_4bitMux26.4@6384.5,4344.5
r5Q2: J?.10@6085,1590 K_U_4bitMux22.5@4850,2325 K_U_4bitMux26.5@6684.5,4344.5
r5Q3: J?.12@6085,1690 K_U_4bitMux22.4@4550,2325 K_U_4bitMux26.4@6384.5,4344.5
r6LD: J?.13@6455,1790
r6Q0: J?.6@6355,1390 K_U_4bitMux21.6@6684.5,4544.5 K_U_4bitMux25.6@6684.5,4544.5
r6Q1: J?.8@6355,1490 K_U_4bitMux21.3@6384.5,4544.5 K_U_4bitMux25.3@6384.5,4544.5
r6Q2: J?.10@6355,1590 K_U_4bitMux21.6@6684.5,4544.5 K_U_4bitMux25.6@6684.5,4544.5
r6Q3: J?.12@6355,1690 K_U_4bitMux21.3@6384.5,4544.5 K_U_4bitMux25.3@6384.5,4544.5
r6r7RDb0: J?.13@4825,1790 K_U_4bitMux21.7@6684.5,4744.5
r6r7RDb1: J?.15@4825,1890 K_U_4bitMux21.2@6384.5,4744.5
r6r7RDb2: J?.14@4725,1790 K_U_4bitMux21.7@6684.5,4744.5
r6r7RDb3: J?.16@4725,1890 K_U_4bitMux21.2@6384.5,4744.5
r6r7RDt0: J?.13@5365,1790 K_U_4bitMux25.7@6684.5,4744.5
r6r7RDt1: J?.15@5365,1890 K_U_4bitMux25.2@6384.5,4744.5
r6r7RDt2: J?.14@5265,1790 K_U_4bitMux25.7@6684.5,4744.5
r6r7RDt3: J?.16@5265,1890 K_U_4bitMux25.2@6384.5,4744.5
r7LD: J?.13@6725,1790
r7Q0: J?.6@6625,1390 K_U_4bitMux21.5@6684.5,4344.5 K_U_4bitMux25.5@6684.5,4344.5
r7Q1: J?.8@6625,1490 K_U_4bitMux21.4@6384.5,4344.5 K_U_4bitMux25.4@6384.5,4344.5
r7Q2: J?.10@6625,1590 K_U_4bitMux21.5@6684.5,4344.5 K_U_4bitMux25.5@6684.5,4344.5
r7Q3: J?.12@6625,1690 K_U_4bitMux21.4@6384.5,4344.5 K_U_4bitMux25.4@6384.5,4344.5
RDb0: J?.13@7270,1790
RDb1: J?.15@7270,1890
RDb2: J?.14@7170,1790
RDb3: J?.16@7170,1890
RDt0: J?.6@7170,1390
RDt1: J?.8@7170,1490
RDt2: J?.10@7170,1590
RDt3: J?.12@7170,1690
WE: J?.11@4825,1690 J?.13@7000,1790
pads on no net: J?.14@5810,1790 J?.14@6085,1790 J?.14@6355,1790 J?.14@6625,1790 J?.14@6900,1790 J?.14@7445,1790 J?.14@7715,1790 J?.14@7985,1790 J?.14@8260,1790 J?.16@5810,1890 J?.16@6085,1890 J?.16@6355,1890 J?.16@6625,1890 J?.16@6900,1890 J?.16@7445,1890 J?.16@7715,1890 J?.16@7985,1890 J?.16@8260,1890
copper on no net:
  other v1: 1200,1200 4240,1200 1200,4240 4240,4240

## Polygon pours and split planes (outlines as drawn)
no net on Bottom Signal "NONET_L04_P000" (solid, shelved, pour order 0): 1000,3990 cw(c1100,3990) 1100,4090 1250,4090 ccw(c1250,4190) 1350,4190 1350,4340 cw(c1450,4340) 1450,4440 3990,4440 cw(c3990,4340) 4090,4340 4090,4190 ccw(c4190,4190) 4190,4090 4340,4090 cw(c4340,3990) 4440,3990 4440,1450 cw(c4340,1450) 4340,1350 4190,1350 ccw(c4190,1250) 4090,1250 4090,1100 cw(c3990,1100) 3990,1000 1450,1000 cw(c1450,1100) 1350,1100 1350,1250 ccw(c1250,1250) 1250,1350 1100,1350 cw(c1100,1450) 1000,1450 1000,2725
no net on Top Signal "NONET_L01_P001" (solid, shelved, pour order 1): 1000,3990 cw(c1100,3990) 1100,4090 1250,4090 ccw(c1250,4190) 1350,4190 1350,4340 cw(c1450,4340) 1450,4440 3990,4440 cw(c3990,4340) 4090,4340 4090,4190 ccw(c4190,4190) 4190,4090 4340,4090 cw(c4340,3990) 4440,3990 4440,1450 cw(c4340,1450) 4340,1350 4190,1350 ccw(c4190,1250) 4090,1250 4090,1100 cw(c3990,1100) 3990,1000 1450,1000 cw(c1450,1100) 1350,1100 1350,1250 ccw(c1250,1250) 1250,1350 1100,1350 cw(c1100,1450) 1000,1450 1000,2725
GND on GND (split plane): 4347.84,4419.61 4355.61,4418.46 4363.22,4416.55 4370.61,4413.91 4377.71,4410.55 4384.44,4406.51 4390.75,4401.84 4396.57,4396.57 4401.84,4390.75 4406.51,4384.44 4410.55,4377.71 4413.91,4370.61 4416.55,4363.22 4418.46,4355.61 4419.61,4347.84 4419.97,4340.63 4419.9,4340 4419.9,1100 4419.97,1099.37 4419.61,1092.16 4418.46,1084.39 4416.55,1076.78 4413.91,1069.39 4410.55,1062.29 4406.51,1055.56 4401.84,1049.25 4396.57,1043.43 4390.75,1038.16 4384.44,1033.49 4377.71,1029.45 4370.61,1026.09 4363.22,1023.45 4355.61,1021.54 4347.84,1020.39 4340.63,1020.03 4340,1020.1 1100,1020.1 1099.37,1020.03 1092.16,1020.39 1084.39,1021.54 1076.78,1023.45 1069.39,1026.09 1062.29,1029.45 1055.56,1033.49 1049.25,1038.16 1043.43,1043.43 1038.16,1049.25 1033.49,1055.56 1029.45,1062.29 1026.09,1069.39 1023.45,1076.78 1021.54,1084.39 1020.39,1092.16 1020.03,1099.37 1020.1,1100 1020.1,2825 1020.1,4340 1020.03,4340.63 1020.39,4347.84 1021.54,4355.61 1023.45,4363.22 1026.09,4370.61 1029.45,4377.71 1033.49,4384.44 1038.16,4390.75 1043.43,4396.57 1049.25,4401.84 1055.56,4406.51 1062.29,4410.55 1069.39,4413.91 1076.78,4416.55 1084.39,4418.46 1092.16,4419.61 1099.37,4419.97 1100,4419.9 4340,4419.9 4340.63,4419.97
+24V on PWR (split plane): 4347.84,4419.61 4355.61,4418.46 4363.22,4416.55 4370.61,4413.91 4377.71,4410.55 4384.44,4406.51 4390.75,4401.84 4396.57,4396.57 4401.84,4390.75 4406.51,4384.44 4410.55,4377.71 4413.91,4370.61 4416.55,4363.22 4418.46,4355.61 4419.61,4347.84 4419.97,4340.63 4419.9,4340 4419.9,1100 4419.97,1099.37 4419.61,1092.16 4418.46,1084.39 4416.55,1076.78 4413.91,1069.39 4410.55,1062.29 4406.51,1055.56 4401.84,1049.25 4396.57,1043.43 4390.75,1038.16 4384.44,1033.49 4377.71,1029.45 4370.61,1026.09 4363.22,1023.45 4355.61,1021.54 4347.84,1020.39 4340.63,1020.03 4340,1020.1 1100,1020.1 1099.37,1020.03 1092.16,1020.39 1084.39,1021.54 1076.78,1023.45 1069.39,1026.09 1062.29,1029.45 1055.56,1033.49 1049.25,1038.16 1043.43,1043.43 1038.16,1049.25 1033.49,1055.56 1029.45,1062.29 1026.09,1069.39 1023.45,1076.78 1021.54,1084.39 1020.39,1092.16 1020.03,1099.37 1020.1,1100 1020.1,2825 1020.1,4340 1020.03,4340.63 1020.39,4347.84 1021.54,4355.61 1023.45,4363.22 1026.09,4370.61 1029.45,4377.71 1033.49,4384.44 1038.16,4390.75 1043.43,4396.57 1049.25,4401.84 1055.56,4406.51 1062.29,4410.55 1069.39,4413.91 1076.78,4416.55 1084.39,4418.46 1092.16,4419.61 1099.37,4419.97 1100,4419.9 4340,4419.9 4340.63,4419.97

## Text inside footprints (layer, text, board x,y; h text height)
K_U_4bitMux21: Top Overlay "*" at 6439.5,5019.5 h50
K_U_4bitMux21: Top Overlay "*" at 6439.5,5019.5 h50
K_U_4bitMux22: Top Overlay "*" at 5415,3000 h50
K_U_4bitMux22: Top Overlay "*" at 4605,3000 h50
K_U_4bitMux23: Top Overlay "*" at 6439.5,5019.5 h50
K_U_4bitMux23: Top Overlay "*" at 6439.5,5019.5 h50
K_U_4bitMux24: Top Overlay "*" at 6439.5,5019.5 h50
K_U_4bitMux24: Top Overlay "*" at 6439.5,5019.5 h50
K_U_4bitMux25: Top Overlay "*" at 6439.5,5019.5 h50
K_U_4bitMux25: Top Overlay "*" at 6439.5,5019.5 h50
K_U_4bitMux26: Top Overlay "*" at 6439.5,5019.5 h50
K_U_4bitMux26: Top Overlay "*" at 6439.5,5019.5 h50
K_U_4bitMux27: Top Overlay "*" at 6439.5,5019.5 h50
K_U_4bitMux27: Top Overlay "*" at 6439.5,5019.5 h50
K_U_4bitMux28: Top Overlay "*" at 6439.5,5019.5 h50
K_U_4bitMux28: Top Overlay "*" at 6439.5,5019.5 h50